# EAGLE board Stark solutions edgeshield (EAGLE 9.7.0)

Size 90.54 x 115.96 mm. Coordinates in mm from the lower left corner, seen from the top.
Outline: 0,0 90.54,0 90.54,115.96 0,115.96 0,0
Copper layers (1*16): Top 0.035mm / dielectric 1.5mm / Bottom 0.035mm
Design rules "default": minimum track width 6mil, minimum drill 0.35mm, track to track 6mil, track to pad 6mil, pad to pad 6mil, via to via 6mil, smd to smd 6mil, copper to edge 40mil, drill to drill 6mil, minimum pad ring 10mil, minimum via ring 8mil, stop-mask expansion 4mil, vias tented up to drill 0mil, thermal gap 10mil

## Footprints (pad centres in the part's own frame; a part is rotated, then mirrored left to right if it is on the bottom)
LEDRD254W60D565H860B = drill 0.981 pad 1.581: 1 -1.27,0; 2 1.27,0
LEDRD254W60D565H860B_O = drill 0.981 pad 1.581: 1 -1.27,0; 2 1.27,0
LEDRD254W60D565H860B_Y = drill 0.981 pad 1.581: 1 -1.27,0; 2 1.27,0
PIEZO = drill 1 pad 1.6: 1 -3.5,0; 2 3.5,0
RESAD1016W63L850D250B = drill 0.83 pad 1.43: 1 -5.08,0; 2 5.08,0
SWITCH-SPDT-PTH-8.5X3.7MM = drill 1.016 pad 1.88: 1 -2.54,0; 2 0,0; 3 2.54,0
ARDUINO-UNO-R3-SHIELD = drill 1.016 pad 1.88: 3.3V 24.13,-2.54; 5V 24.13,0; A0 24.13,12.7; A1 24.13,15.24; A2 24.13,17.78; A3 24.13,20.32; A4 24.13,22.86; A5 24.13,25.4; AREF -24.13,-13.97; D2 -24.13,20.32; D3 -24.13,17.78; D4 -24.13,15.24; D5 -24.13,12.7; D6 -24.13,10.16; D7 -24.13,7.62; D8 -24.13,3.81; D9 -24.13,1.27; D10 -24.13,-1.27; D11 -24.13,-3.81; D12 -24.13,-6.35; D13 -24.13,-8.89; GND@0 24.13,2.54; GND@1 24.13,5.08; GND@2 -24.13,-11.43; IOREF 24.13,-7.62; NC 24.13,-10.16; RES 24.13,-5.08; RX -24.13,25.4; SCL -24.13,-19.05; SDA -24.13,-16.51; TX -24.13,22.86; VIN 24.13,7.62
LCD-I2C = drill 1.016 long: 1 -19.05,-5.08; 2 -19.05,-7.62; 3 -19.05,-10.16; 4 -19.05,-12.7

## Placement (x,y rotation side)
D1  RED  [LEDRD254W60D565H860B]  73.15,95.48 180 top
D2  ORANGE  [LEDRD254W60D565H860B_O]  68.07,95 180 top
D3  YELLOW  [LEDRD254W60D565H860B_Y]  63.24,94.92 180 top
PIEZO1  PIEZO  [PIEZO]  56.4,102.38 0 top
R1  220  [RESAD1016W63L850D250B]  50.05,97.3 90 top
S1  TOGGLE  [SWITCH-SPDT-PTH-8.5X3.7MM]  34.37,100.37 0 top
S2  TOGGLE  [SWITCH-SPDT-PTH-8.5X3.7MM]  18.84,100.52 0 top
S3  TOGGLE  [SWITCH-SPDT-PTH-8.5X3.7MM]  7.42,99.76 0 top
U1  ARDUINO-UNO-R3-SHIELD  [ARDUINO-UNO-R3-SHIELD]  48.78,68.09 270 top
U3  LCD-16X2-I2CSUNFOUNDER-IIC  [LCD-I2C]  34.91,36.63 0 top

## Library data of the parts
D1 = Tinkercad; CATEGORY: Opto-Electronic; SUB-CATEGORY: LED; VALUE: LED_RED
D2 = Tinkercad; CATEGORY: Opto-Electronic; SUB-CATEGORY: LED; VALUE: LED_ORANGE
D3 = Tinkercad; CATEGORY: Opto-Electronic; SUB-CATEGORY: LED; VALUE: LED_YELLOW
PIEZO1 R1 S1-S3 U1 U3 = Tinkercad

## Nets
PIEZO1_1: PIEZO1.1 R1.2
U1_5V: S1.3 S2.3 S3.3 U1.5V U3.2
U1_D2: D3.1 U1.D2
U1_D3: D2.1 U1.D3
U1_D4: D1.1 U1.D4
U1_D5: S1.2 U1.D5
U1_D6: S2.2 U1.D6
U1_D7: S3.2 U1.D7
U1_D9: R1.1 U1.D9
U1_GND: D1.2 D2.2 D3.2 PIEZO1.2 S1.1 S2.1 S3.1 U1.GND@0 U1.GND@1 U1.GND@2 U3.1
U1_SCL: U1.SCL U3.4
U1_SDA: U1.SDA U3.3

## Tracks (layer width: path | path; a pad name or v marks a point on that pad's centre or on a via)
PIEZO1_1  (1 unrouted)
U1_5V  (4 unrouted)
U1_D2  (1 unrouted)
U1_D3  (1 unrouted)
U1_D4  (1 unrouted)
U1_D5  (1 unrouted)
U1_D6  (1 unrouted)
U1_D7  (1 unrouted)
U1_D9  (1 unrouted)
U1_GND  (10 unrouted)
U1_SCL  (1 unrouted)
U1_SDA  (1 unrouted)